# Altium PCB PCB1.PcbDoc
Units mil, origin at the board's own origin, x right, y up, seen from the top; angles counter-clockwise.
Board outline 12401 x 1377.95 mil, 2 copper layers (Top Layer, Bottom Layer); 90 components, 65 nets, 236 pads, 77 vias.
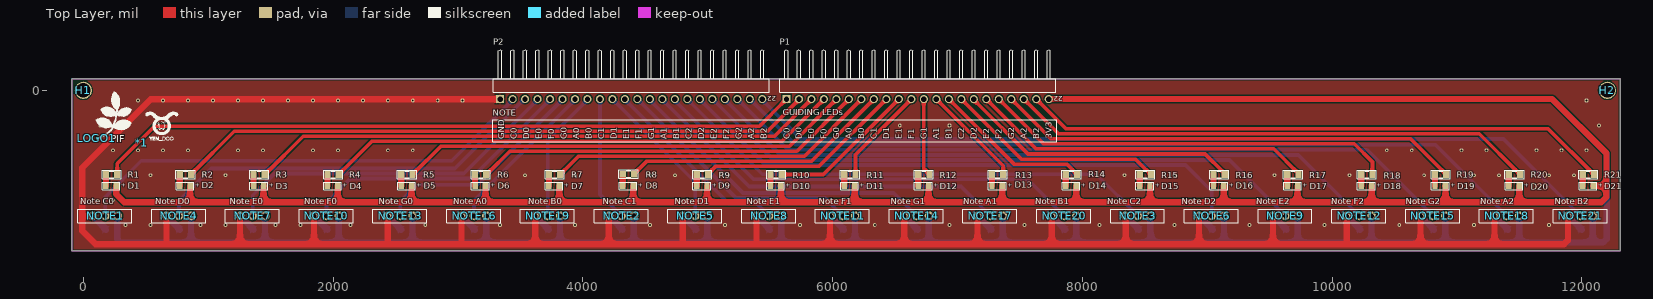
[diagram p0: Top Layer view]
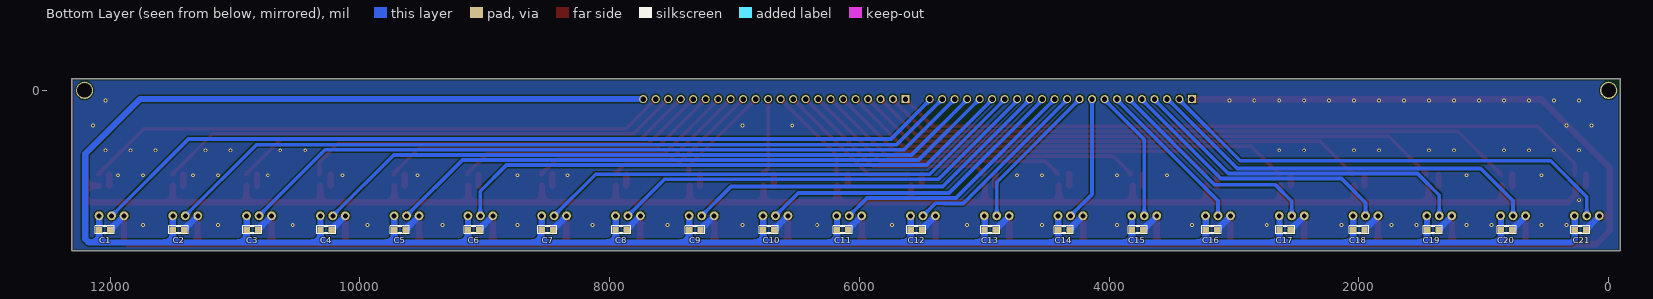
[diagram p1: Bottom Layer view, seen from below]
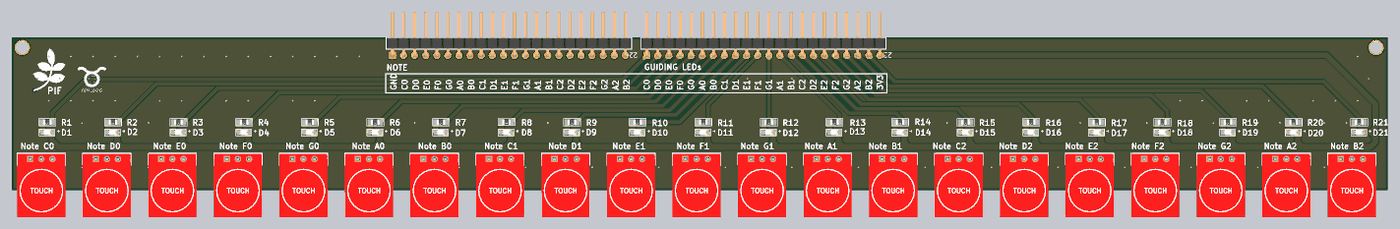
[diagram p2: 3D render of the assembled board from above, using the file's embedded part models]
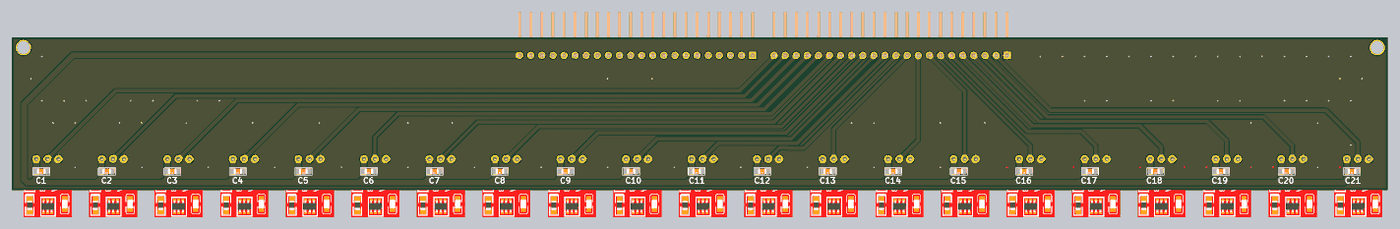
[diagram p3: 3D render of the assembled board from below, using the file's embedded part models]

## Layer stack, top to bottom
Top Solder: solder mask 0.4, Solder Resist, Dk 3.5
Top Layer: signal copper 1.4
Dielectric 1: dielectric 12.6, FR-4, Dk 4.8
Bottom Layer: signal copper 1.4
Bottom Solder: solder mask 0.4, Solder Resist, Dk 3.5

## Board outline
-93,-1286 -93,91.95 12308,91.95 12308,-1286

## Design rules (kind name [scope] priority, off if disabled: settings)
Clearance [All] p1: gap=10 ignorepadtopadclearanceinfootprint=FALSE except(0: Arc-Hole Track-Hole SMDPad-Hole THPad-Hole Via-Hole Fill-Hole Poly-Hole Region-Hole Text-Hole)
PolygonConnect [All] p1: connectstyle=Relief reliefconductorwidth=10 reliefentries=4 polygonreliefangle="90 Angle" airgapwidth=10
RoutingVias [All] p1: holewidth=28 width=50 viastyle="Through Hole" minholewidth=28 minwidth=50 maxholewidth=28 maxwidth=50
SolderMaskExpansion [All] p1: expansion=4 istentingtop=FALSE
Width [All] p1: maxlimit=50 minlimit=10 preferedwidth=30 minimp=50.000000 maximp=50.000000 favimp=50.000000
30 further rules are at their usual default settings.

## Components (designator, comment, footprint, x,y, rotation, side; value= is the part's Value field where it differs from the comment)
*1 "LOGO_DOO" Logo_Top_Overlay 468,-419 r0 top
C1 "Cap-100nF-50V-0805" CAP-SM-0805 11999,-1117 r0 bottom value=100nF/50V
C2 "Cap-100nF-50V-0805" CAP-SM-0805 11408.15,-1117 r0 bottom value=100nF/50V
C3 "Cap-100nF-50V-0805" CAP-SM-0805 10817.3,-1117 r0 bottom value=100nF/50V
C4 "Cap-100nF-50V-0805" CAP-SM-0805 10226.45,-1117 r0 bottom value=100nF/50V
C5 "Cap-100nF-50V-0805" CAP-SM-0805 9635.6,-1117 r0 bottom value=100nF/50V
C6 "Cap-100nF-50V-0805" CAP-SM-0805 9044.75,-1117 r0 bottom value=100nF/50V
C7 "Cap-100nF-50V-0805" CAP-SM-0805 8453.9,-1117 r0 bottom value=100nF/50V
C8 "Cap-100nF-50V-0805" CAP-SM-0805 7863.05,-1117 r0 bottom value=100nF/50V
C9 "Cap-100nF-50V-0805" CAP-SM-0805 7272.2,-1117 r0 bottom value=100nF/50V
C10 "Cap-100nF-50V-0805" CAP-SM-0805 6681.35,-1117 r0 bottom value=100nF/50V
C11 "Cap-100nF-50V-0805" CAP-SM-0805 6090.5,-1117 r0 bottom value=100nF/50V
C12 "Cap-100nF-50V-0805" CAP-SM-0805 5499.65,-1117 r0 bottom value=100nF/50V
C13 "Cap-100nF-50V-0805" CAP-SM-0805 4908.8,-1117 r0 bottom value=100nF/50V
C14 "Cap-100nF-50V-0805" CAP-SM-0805 4317.95,-1117 r0 bottom value=100nF/50V
C15 "Cap-100nF-50V-0805" CAP-SM-0805 3727.1,-1117 r0 bottom value=100nF/50V
C16 "Cap-100nF-50V-0805" CAP-SM-0805 3136.25,-1117 r0 bottom value=100nF/50V
C17 "Cap-100nF-50V-0805" CAP-SM-0805 2545.4,-1117 r0 bottom value=100nF/50V
C18 "Cap-100nF-50V-0805" CAP-SM-0805 1954.55,-1117 r0 bottom value=100nF/50V
C19 "Cap-100nF-50V-0805" CAP-SM-0805 1363.7,-1117 r0 bottom value=100nF/50V
C20 "Cap-100nF-50V-0805" CAP-SM-0805 772.85,-1117 r0 bottom value=100nF/50V
C21 "Cap-100nF-50V-0805" CAP-SM-0805 182,-1117 r0 bottom value=100nF/50V
D1 "Blue, 3.2V" WL-SMCW_0805 222,-765 r0 top
D2 "Blue, 3.2V" WL-SMCW_0805 813.33,-765 r0 top
D3 "Blue, 3.2V" WL-SMCW_0805 1404.67,-765 r0 top
D4 "Blue, 3.2V" WL-SMCW_0805 1996,-765 r0 top
D5 "Blue, 3.2V" WL-SMCW_0805 2587.33,-765 r0 top
D6 "Blue, 3.2V" WL-SMCW_0805 3178.66,-765 r0 top
D7 "Blue, 3.2V" WL-SMCW_0805 3770,-765 r0 top
D8 "Blue, 3.2V" WL-SMCW_0805 4361.33,-765 r0 top
D9 "Blue, 3.2V" WL-SMCW_0805 4952.66,-765 r0 top
D10 "Blue, 3.2V" WL-SMCW_0805 5544,-765 r0 top
D11 "Blue, 3.2V" WL-SMCW_0805 6135.33,-765 r0 top
D12 "Blue, 3.2V" WL-SMCW_0805 6726.66,-765 r0 top
D13 "Blue, 3.2V" WL-SMCW_0805 7318,-765 r0 top
D14 "Blue, 3.2V" WL-SMCW_0805 7909.33,-765 r0 top
D15 "Blue, 3.2V" WL-SMCW_0805 8500.66,-765 r0 top
D16 "Blue, 3.2V" WL-SMCW_0805 9092,-765 r0 top
D17 "Blue, 3.2V" WL-SMCW_0805 9683.33,-765 r0 top
D18 "Blue, 3.2V" WL-SMCW_0805 10274.66,-765 r0 top
D19 "Blue, 3.2V" WL-SMCW_0805 10865.99,-765 r0 top
D20 "Blue, 3.2V" WL-SMCW_0805 11457.33,-765 r0 top
D21 "Blue, 3.2V" WL-SMCW_0805 12048.66,-765 r0 top
H1 "Hole" "LO KHOAN 3MM" 0,0 r0 top
H2 "Hole" "LO KHOAN 3MM" 12204.72,0 r0 top
LOGO1 "LOGO PIF" "PIF LOGO BIG SSTOP" 98,-399 r0 top
NOTE1 "TTP223" TTP223 75,-1005 r0 top
NOTE2 "TTP223" TTP223 4209.9,-1005 r0 top
NOTE3 "TTP223" TTP223 8344.8,-1005 r0 top
NOTE4 "TTP223" TTP223 665.7,-1005 r0 top
NOTE5 "TTP223" TTP223 4800.6,-1005 r0 top
NOTE6 "TTP223" TTP223 8935.5,-1005 r0 top
NOTE7 "TTP223" TTP223 1256.4,-1005 r0 top
NOTE8 "TTP223" TTP223 5391.3,-1005 r0 top
NOTE9 "TTP223" TTP223 9526.2,-1005 r0 top
NOTE10 "TTP223" TTP223 1847.1,-1005 r0 top
NOTE11 "TTP223" TTP223 5982,-1005 r0 top
NOTE12 "TTP223" TTP223 10116.9,-1005 r0 top
NOTE13 "TTP223" TTP223 2437.8,-1005 r0 top
NOTE14 "TTP223" TTP223 6572.7,-1005 r0 top
NOTE15 "TTP223" TTP223 10707.6,-1005 r0 top
NOTE16 "TTP223" TTP223 3028.5,-1005 r0 top
NOTE17 "TTP223" TTP223 7163.4,-1005 r0 top
NOTE18 "TTP223" TTP223 11298.3,-1005 r0 top
NOTE19 "TTP223" TTP223 3619.2,-1005 r0 top
NOTE20 "TTP223" TTP223 7754.1,-1005 r0 top
NOTE21 "TTP223" TTP223 11889,-1005 r0 top
P1 "61302211021" 61302211021 6681,39.06 r180 top
P2 "61302211021" 61302211021 4387.23,39.06 r180 top
R1 "RESISTOR SMD" RES-SM-0805 271,-674 r180 top value=1k
R2 "RESISTOR SMD" RES-SM-0805 862.3,-674 r180 top value=1k
R3 "RESISTOR SMD" RES-SM-0805 1453.6,-674 r180 top value=1k
R4 "RESISTOR SMD" RES-SM-0805 2044.9,-674 r180 top value=1k
R5 "RESISTOR SMD" RES-SM-0805 2636.2,-674 r180 top value=1k
R6 "RESISTOR SMD" RES-SM-0805 3227.5,-674 r180 top value=1k
R7 "RESISTOR SMD" RES-SM-0805 3818.8,-674 r180 top value=1k
R8 "RESISTOR SMD" RES-SM-0805 4410,-670 r180 top value=1k
R9 "RESISTOR SMD" RES-SM-0805 5001.4,-674 r180 top value=1k
R10 "RESISTOR SMD" RES-SM-0805 5592.7,-674 r180 top value=1k
R11 "RESISTOR SMD" RES-SM-0805 6184,-674 r180 top value=1k
R12 "RESISTOR SMD" RES-SM-0805 6775.3,-674 r180 top value=1k
R13 "RESISTOR SMD" RES-SM-0805 7366.6,-674 r180 top value=1k
R14 "RESISTOR SMD" RES-SM-0805 7957.9,-674 r180 top value=1k
R15 "RESISTOR SMD" RES-SM-0805 8549.2,-674 r180 top value=1k
R16 "RESISTOR SMD" RES-SM-0805 9140.5,-674 r180 top value=1k
R17 "RESISTOR SMD" RES-SM-0805 9731.8,-674 r180 top value=1k
R18 "RESISTOR SMD" RES-SM-0805 10323.1,-674 r180 top value=1k
R19 "RESISTOR SMD" RES-SM-0805 10914.4,-674 r180 top value=1k
R20 "RESISTOR SMD" RES-SM-0805 11505.7,-674 r180 top value=1k
R21 "RESISTOR SMD" RES-SM-0805 12097,-674 r180 top value=1k

## Footprints (in the part's own frame and the unit in brackets; to place one, negate y for a bottom-side part, rotate by r counter-clockwise, add the part's x,y. Pads: shape width x height; smd on the part's side, far side on the other; paste and mask are expansions set on the pad)
61302211021 [mm] "Pin Header, pitch 2.54 mm, THT, Angled, single row, 22p"
  rect 1.65x1.65 hole 1.1: 1(26.67,2.77)
  round 1.65 hole 1.1: 2(24.13,2.77) 3(21.59,2.77) 4(19.05,2.77) 5(16.51,2.77) 6(13.97,2.77) 7(11.43,2.77) 8(8.89,2.77) 9(6.35,2.77) 10(3.81,2.77) 11(1.27,2.77) 12(-1.27,2.77) 13(-3.81,2.77) 14(-6.35,2.77) 15(-8.89,2.77) 16(-11.43,2.77) 17(-13.97,2.77) 18(-16.51,2.77) 19(-19.05,2.77) 20(-21.59,2.77) 21(-24.13,2.77) 22(-26.67,2.77)
  silkscreen extent -28.09,-7.27 28.09,1.35, body extent -27.94,-7.27 27.94,3.09, height 2.58
CAP-SM-0805 [mil]
  rect 50x55 smd: 1(0,0) 2(90,0)
  silkscreen extent -32,-34 121,33, body extent 6,-25 84,25, height 31
"LO KHOAN 3MM" [mil]
  round 138 hole 118.1: 1(0,0)
Logo_Top_Overlay [mil]
  silkscreen extent 30,16 290,246
"PIF LOGO BIG SSTOP" [mil]
  rect 15x15 smd: 1(11,14)
  silkscreen extent 0,14 289,389
RES-SM-0805 [mil]
  rect 50x55 smd: 1(0,0) 2(90,0)
  silkscreen extent -32,-34 121,33, body extent 6,-25 84,25, height 31
TTP223 [mm]
  round 1.8 hole 1: 1(0,0) 2(2.54,0) 3(5.08,0)
  silkscreen extent -3.02,-1.4 7.95,1.32, body extent -3.04,-13.32 7.96,1.19, height 13.41
WL-SMCW_0805 [mm] "SMD Mono-color Chip LED, body 2.0x1.25mm"
  rect 1.1x1.2 smd: 1(-1.05,0) 2(1.05,0)
  silkscreen extent -1.8,-0.79 1.8,0.79, body extent -1,-0.63 1,0.62, height 0.7

## Part data
C1 C2 C3 C4 C5 C6 C7 C8 C9 C10 C11 C12 C13 C14 C15 C16 C17 C18 C19 C20 C21: "CAP CER 0.1UF 50V Y5V 0805", Manufacturer="Samsung Electro-Mechanics", Manufacturer Part Number=CL21F104ZBCNNNC, Supplier 1 Part Number=1276-1007-1-ND, Local Supplier=thegioiic, Local Supplier Link=https://thegioiic.com/products/tu-100nf-0-1uf-50v-0805, Supplier 1=Digikey, Supplier 1 Link=https://www.digikey.com/product-detail/en/samsung-electro-mechanics/CL21F104ZBCNNNC/1276-1007-1-ND/3889093
D1 D2 D3 D4 D5 D6 D7 D8 D9 D10 D11 D12 D13 D14 D15 D16 D17 D18 D19 D20 D21: library part 150080BS75000, "WL-SMCW SMT Mono-color Chip LED Waterclear, size 0805, Blue, 3.2V, 140deg", Emitting Color=Blue, Forward Voltage typ.=3.2V, Operating Temperature="-40 to +85degC", Chip Technology=InGaN, ComponentLink1Description=Manufacturer, ComponentLink1URL=http://www.we-online.de, ComponentLink2Description=Datasheet, ComponentLink2URL=https://www.we-online.com/catalog/datasheet/150080BS75000.pdf, Dominant Wavelength typ.=470nm, Luminous Intensity typ.=145mcd, Mounting Technology=SMT, Packaging="Tape and Reel", Part Number=150080BS75000, Peak Wavelength typ.=465nm, Published Date="December 2019", Publisher="Wurth Elektronik", Size=0805, Viewing Angle=140deg
H1 H2: "Hole 3mm"
P1 P2: "WR-PHD Pin Header, THT, pitch 2.54mm, Single Row, Angled, 22p", Contact Resistance=20mOhm, Manufacturer="Wurth Elektronik", Operating Temperature="-40 to +105degC", Rated Current=3A, Withstanding Voltage=500VAC, Working Voltage=250VAC, ComponentLink1Description=Manufacturer, ComponentLink1URL=http://www.we-online.de, ComponentLink2Description=Datasheet, ComponentLink2URL=https://www.we-online.com/catalog/datasheet/61302211021.pdf, Gender="Pin Header", Manufacturer Part Number=61302211021, Mounting Technology=THT, Orientation=Angled, Packaging=Bag, Pin Number=22, Pitch=2.54mm, Published Date="May 2020", Row Number=Single
R1 R2 R3 R4 R5 R6 R7 R8 R9 R10 R11 R12 R13 R14 R15 R16 R17 R18 R19 R20 R21: "Resistor"

## Via types
v1: diameter 31.5/31.5 (per signal layer), hole 15.75, Top Layer to Bottom Layer, tented both sides, 77 vias

## Nets (pads, with @x,y where several pads share a name; then routed paths per layer and width w, separated by ;. In a path a pad name is that pad's centre, name@x,y a point inside that pad or via, vN(x,y) a via of type N, cw(c..) or ccw(c..) an arc to the next point about the centre after c; other vN are vias at no path point)
3V3: C1.2 C2.2 C3.2 C4.2 C5.2 C6.2 C7.2 C8.2 C9.2 C10.2 C11.2 C12.2 C13.2 C14.2 C15.2 C16.2 C17.2 C18.2 C19.2 C20.2 C21.2 D1.2 D2.2 D3.2 D4.2 D5.2 D6.2 D7.2 D8.2 D9.2 D10.2 D11.2 D12.2 D13.2 D14.2 D15.2 D16.2 D17.2 D18.2 D19.2 D20.2 D21.2 NOTE1.3 NOTE2.3 NOTE3.3 NOTE4.3 NOTE5.3 NOTE6.3 NOTE7.3 NOTE8.3 NOTE9.3 NOTE10.3 NOTE11.3 NOTE12.3 NOTE13.3 NOTE14.3 NOTE15.3 NOTE16.3 NOTE17.3 NOTE18.3 NOTE19.3 NOTE20.3 NOTE21.3 P1.22 | length 41408.1
  Top Layer w50: D1.2 263,-765.34 263,-831 328,-896 854,-896 ; D2.2 854,-765.67 854,-896 ; D3.2 1443,-768 1443,-896 ; D4.2 2037,-765.34 2037,-896 ; D5.2 2628,-765.67 2628,-896 ; D6.2 3220,-896 ; D7.2 3812,-765.66 3812,-896 ; D8.2 4403,-765.33 4403,-896 ; D9.2 4994,-896 ; D10.2 5586,-765.66 5586,-896 ; D11.2 6177,-765.33 6177,-896 ; D12.2 6768,-896 ; D13.2 7359,-765.33 7359,-896 ; P1.22@7731,-69 11761,-69 12198,-506 12198,-765 ; D14.2 7951,-765.33 7951,-896 ; D15.2 8542,-896 ; D16.2 9133,-765.33 9133,-896 ; D17.2@9724,-765.67 9724,-896 ; D18.2 10317,-766 10317,-896 ; D19.2 10908,-765.67 10908,-896 ; D20.2 11499,-765.33 11499,-896 ; D21.2 12198,-765 ; 854,-896 1443,-896 ; 1443,-896 2037,-896 ; 2037,-896 2628,-896 ; 2628,-896 3220,-896 ; 3220,-896 3812,-896 ; 3812,-896 4403,-896 ; 4403,-896 4994,-896 ; 4994,-896 5586,-896 ; 5586,-896 6177,-896 ; 6177,-896 6768,-896 ; 6768,-896 7359,-896 ; 7359,-896 7951,-896 ; 7951,-896 8542,-896 ; 8542,-896 9133,-896 ; 9133,-896 9724,-896 ; 9724,-896 10317,-896 ; 10317,-896 10908,-896 ; 10908,-896 11499,-896 ; 11499,-896 12155,-896 12198,-853 12198,-765
  Bottom Layer w50: NOTE1.3 272,-1008 C21.2 272,-1189.71 301.29,-1219 863,-1219 ; NOTE4.3 862.85,-1007.85 C20.2 862.85,-1134.14 863,-1134.29 863,-1219 ; NOTE7.3 1454,-1007.4 1454,-1117 1454,-1219 ; NOTE10.3 2045,-1007.1 2045,-1117 2045,-1219 ; NOTE13.3 2635.4,-1007.4 2635.4,-1134.14 2635,-1134.54 2635,-1219 ; NOTE16.3 3226,-1007.5 3226,-1117 3226,-1219 ; NOTE19.3 3817,-1007.2 3817,-1117 3817,-1219 ; NOTE2.3 4408,-1006.9 C14.2 4408,-1219 ; NOTE5.3 4997,-1008.6 4997,-1117 4997,-1219 ; NOTE8.3 5589,-1007.3 5589,-1117 5589,-1219 ; NOTE11.3 6180,-1007 6180,-1117 6180,-1219 ; NOTE14.3 6770,-1007.7 6770,-1117 6770,-1219 ; NOTE17.3 7362,-1006.4 7362,-1099.66 7362.2,-1099.86 C9.2 7362.2,-1134.14 7364,-1135.94 7364,-1219 ; P1.22@7731,-69 11760,-69 12199,-508 12199,-1189.71 12169.71,-1219 12088,-1219 ; NOTE20.3 7951,-1008.1 7951,-1117 7951,-1219 ; C7.2 8543.9,-1134.14 8548.8,-1139.04 8548.8,-1219 ; C7.2@8544.8,-1117 NOTE3.3 ; NOTE6.3 9135,-1005.5 9135,-1117 9135,-1219 ; NOTE9.3 9725,-1006.2 9725,-1117 9725,-1219 ; NOTE12.3 10316,-1005.9 10316,-1117 10316,-1219 ; NOTE15.3 10907,-1005.6 10907,-1117 10907,-1219 ; NOTE18.3 11499,-1005.7 11499,-1117 11499,-1219 ; NOTE21.3 12088,-1006 12088,-1117 12088,-1219 ; 863,-1219 1454,-1219 ; 1454,-1219 2045,-1219 ; 2045,-1219 2635,-1219 ; 2635,-1219 3226,-1219 ; 3226,-1219 3817,-1219 ; 3817,-1219 4408,-1219 ; 4408,-1219 4997,-1219 ; 4997,-1219 5589,-1219 ; 5589,-1219 6180,-1219 ; 6180,-1219 6770,-1219 ; 6770,-1219 7364,-1219 ; 7364,-1219 7951,-1219 ; 7951,-1219 8548.8,-1219 ; 8548.8,-1219 9135,-1219 ; 9135,-1219 9725,-1219 ; 9725,-1219 10316,-1219 ; 10316,-1219 10907,-1219 ; 10907,-1219 11499,-1219 ; 11499,-1219 12088,-1219
GND: C1.1 C2.1 C3.1 C4.1 C5.1 C6.1 C7.1 C8.1 C9.1 C10.1 C11.1 C12.1 C13.1 C14.1 C15.1 C16.1 C17.1 C18.1 C19.1 C20.1 C21.1 NOTE1.1 NOTE2.1 NOTE3.1 NOTE4.1 NOTE5.1 NOTE6.1 NOTE7.1 NOTE8.1 NOTE9.1 NOTE10.1 NOTE11.1 NOTE12.1 NOTE13.1 NOTE14.1 NOTE15.1 NOTE16.1 NOTE17.1 NOTE18.1 NOTE19.1 NOTE20.1 NOTE21.1 P2.1 | length 23943.5
  Top Layer w50: NOTE1.1 71.01,-1008.99 -7.99,-1008.99 ; NOTE4.1 665.7,-1226.7 671,-1232 ; NOTE7.1 1254,-1007.4 1254,-1232 ; NOTE10.1 1848,-1005.9 1848,-1232 ; NOTE13.1 2437.8,-1226.2 2432,-1232 ; NOTE16.1 3028.5,-1226.5 3034,-1232 ; P2.1@3337.23,-71 540,-71 -8,-619 -8,-1009 ; NOTE19.1 3619,-1005.2 3619,-1232 ; NOTE2.1 4208,-1006.9 4208,-1232 ; NOTE5.1 4800.6,-1227.6 4805,-1232 ; NOTE8.1 5391.3,-1227.7 5387,-1232 ; NOTE11.1 5979,-1008 5979,-1232 ; NOTE14.1 6574,-1006.3 6574,-1232 ; NOTE17.1 7160,-1008.4 7160,-1232 ; NOTE20.1 7755,-1005.9 7755,-1232 ; NOTE3.1 8348,-1008.2 8348,-1232 ; NOTE6.1 8935,-1005.5 8935,-1232 ; NOTE9.1 9526,-1005.2 9526,-1232 ; NOTE12.1 10116.9,-1226.1 10111,-1232 ; NOTE15.1 10709,-1006.4 10709,-1232 ; NOTE18.1 11300,-1006.7 11300,-1232 ; NOTE21.1 11889,-1200 11857,-1232 11300,-1232 ; -8,-1009 -8,-1125 99,-1232 671,-1232 ; 671,-1232 1254,-1232 ; 1254,-1232 1848,-1232 ; 1848,-1232 2432,-1232 ; 2432,-1232 3034,-1232 ; 3034,-1232 3619,-1232 ; 3619,-1232 4208,-1232 ; 4208,-1232 4805,-1232 ; 4805,-1232 5387,-1232 ; 5387,-1232 5979,-1232 ; 5979,-1232 6574,-1232 ; 6574,-1232 7160,-1232 ; 7160,-1232 7755,-1232 ; 7755,-1232 8348,-1232 ; 8348,-1232 8935,-1232 ; 8935,-1232 9526,-1232 ; 9526,-1232 10111,-1232 ; 10111,-1232 10709,-1232 ; 10709,-1232 11300,-1232
  Bottom Layer w50: NOTE1.1 75,-1007.5 182,-1114.5 C21.1 ; NOTE4.1 665.7,-1007.35 772.85,-1114.5 C20.1 ; NOTE7.1 1256.4,-1007.2 1363.7,-1114.5 C19.1 ; NOTE10.1 1847.1,-1007.05 1954.55,-1114.5 C18.1 ; NOTE13.1 2437.8,-1006.9 2545.4,-1114.5 C17.1 ; NOTE16.1 3028.5,-1006.75 3136.25,-1114.5 C16.1 ; NOTE19.1 3619.2,-1006.6 3727.1,-1114.5 C15.1 ; NOTE2.1 4209.9,-1006.45 4317.95,-1114.5 C14.1 ; NOTE5.1 4800.6,-1006.3 4908.8,-1114.5 C13.1 ; NOTE8.1 5391.3,-1006.15 5499.65,-1114.5 C12.1 ; NOTE11.1 5982,-1006 6090.5,-1114.5 C11.1 ; NOTE14.1 6572.7,-1005.85 6681.35,-1114.5 C10.1 ; NOTE17.1 7163.4,-1005.7 7272.2,-1114.5 C9.1 ; NOTE20.1 7754.1,-1005.55 7863.05,-1114.5 C8.1 ; NOTE3.1 8344.8,-1005.4 8453.9,-1114.5 C7.1 ; NOTE6.1 8935.5,-1005.25 9044.75,-1114.5 C6.1 ; NOTE9.1 9526.2,-1005.1 9635.6,-1114.5 C5.1 ; NOTE12.1 10116.95,-1005 10226.45,-1114.5 C4.1 ; NOTE15.1 10707.8,-1005 10817.3,-1114.5 C3.1 ; NOTE18.1 11298.65,-1005 11408.15,-1114.5 C2.1 ; NOTE21.1 11998.5,-1114.5 11999,-1114.5 C1.1
  other v1: 338,-1080 538,-1080 938,-1080 1138,-1080 1538,-1080 1738,-1080 2138,-1080 2738,-1080 3338,-1080 3938,-1080 4538,-1080 5138,-1080 5738,-1080 6338,-1080 6938,-1080 7538,-1080 8138,-1080 8738,-1080 9338,-1080 9938,-1080 10538,-1080 11138,-1080 11738,-1080 238,-880 538,-680 1138,-680 3538,-680 3938,-680 4538,-680 4738,-680 8338,-680 8738,-680 9538,-680 10138,-680 10738,-680 11138,-680 11338,-680 11738,-680 11938,-680 238,-480 438,-480 638,-480 838,-480 1238,-480 1438,-480 1838,-480 2038,-480 2438,-480 2638,-480 10438,-480 10638,-480 11038,-480 11238,-480 11638,-480 11838,-480 12038,-480 138,-280 338,-280 6538,-280 6938,-280 12138,-280 238,-80 438,-80 638,-80 838,-80 1038,-80 1238,-80 1438,-80 1638,-80 1838,-80 2038,-80 2238,-80 2438,-80 2638,-80 2838,-80 3038,-80 12038,-80
LED_A0: P1.6 R6.1 | length 3156.1
  Top Layer w30: R6.1 3227.5,-671.5 3237.5,-661.5 3240,-661.5 3414.5,-487 5714,-487 P1.6 P1.6@6131,-69
LED_A1: P1.13 R13.1 | length 826.9
  Top Layer w30: P1.13@6831,-69 7366.6,-604.6 R13.1
LED_A2: P1.20 R20.1 | length 4226.8
  Top Layer w30: P1.20@7531,-69 7809,-347 11178.7,-347 11493.2,-661.5 11495.7,-661.5 11505.7,-671.5 R20.1
LED_B0: P1.7 R7.1 | length 2664.8
  Top Layer w30: R7.1 3818.8,-671.5 3828.8,-661.5 3831.3,-661.5 3965.8,-527 5774,-527 P1.7 P1.7@6231,-69
LED_B1: P1.14 R14.1 | length 1279
  Top Layer w30: P1.14@6931,-69 7453,-591 7874.9,-591 7945.4,-661.5 7947.9,-661.5 7957.9,-671.5 R14.1
LED_B2: P1.21 R21.1 | length 4718.1
  Top Layer w30: P1.21@7631,-69 7869,-307 11730,-307 12084.5,-661.5 12087,-661.5 12097,-671.5 R21.1
LED_C0: P1.1 R1.1 | length 5661.1
  Top Layer w30: R1.1 271,-587 571,-287 5413.95,-287 5613.47,-87.48 5613.52,-87.48 P1.1
LED_C1: P1.8 R8.1 | length 2172
  Top Layer w30: R8.1 4410,-667.5 4420,-657.5 4422.5,-657.5 4513,-567 5834,-567 P1.8 P1.8@6331,-69
LED_C2: P1.15 R15.1 | length 1770.3
  Top Layer w30: P1.15@7031,-69 7513,-551 8426.2,-551 8536.7,-661.5 8539.2,-661.5 8549.2,-671.5 R15.1
LED_D0: P1.2 R2.1 | length 5122.7
  Top Layer w30: R2.1 862.3,-671.5 872.3,-661.5 874.8,-661.5 1209.3,-327 5478,-327 5731,-74 P1.2
LED_D1: P1.9 R9.1 | length 1681.7
  Top Layer w30: R9.1 5001.4,-671.5 5065.9,-607 5893,-607 P1.9@6431,-69
LED_D2: P1.16 R16.1 | length 2268.6
  Top Layer w30: P1.16@7131,-69 7131,-76 7564,-509 8983,-509 9130.5,-656.5 9130.5,-664 R16.1
LED_E0: P1.3 R3.1 | length 4630
  Top Layer w30: R3.1 1453.6,-671.5 1463.6,-661.5 1466.1,-661.5 1760.6,-367 5534,-367 P1.3 P1.3@5831,-69
LED_E1: P1.10 R10.1 | length 1188.9
  Top Layer w30: R10.1 5926,-674 P1.10@6531,-69
LED_E2: P1.17 R17.1 | length 2755.6
  Top Layer w30: P1.17@7231,-69 7630,-468 9533,-468 9721.8,-656.8 9721.8,-664 R17.1
LED_F0: P1.4 R4.1 | length 4138.7
  Top Layer w30: R4.1 2044.9,-671.5 2054.9,-661.5 2057.4,-661.5 2311.9,-407 5594,-407 P1.4 P1.4@5931,-69
LED_F1: P1.11 R11.1 | length 790.2
  Top Layer w30: R11.1 6184,-516 P1.11@6631,-69
LED_F2: P1.18 R18.1 | length 3301.2
  Top Layer w30: P1.18@7331,-69 7690,-428 10177,-428 10323.1,-574.1 R18.1
LED_G0: P1.5 R5.1 | length 3647.4
  Top Layer w30: R5.1 2636.2,-671.5 2646.2,-661.5 2648.7,-661.5 2863.2,-447 5654,-447 P1.5 P1.5@6031,-69
LED_G1: P1.12 R12.1 | length 623.3
  Top Layer w30: P1.12@6731,-69 6731,-627.2 6775.3,-671.5 R12.1
LED_G2: P1.19 R19.1 | length 3735.5
  Top Layer w30: P1.19@7431,-69 7749,-387 10627.4,-387 10901.9,-661.5 10904.4,-661.5 10914.4,-671.5 R19.1
NetD1_1: D1.1 R1.2 | length 91.1
  Top Layer w50: D1.1 181,-764.66 R1.2
NetD2_1: D2.1 R2.2 | length 91.1
  Top Layer w50: D2.1 772.3,-764.69 R2.2
NetD3_1: D3.1 R3.2 | length 91.1
  Top Layer w50: D3.1 1363.6,-764.73 R3.2
NetD4_1: D4.1 R4.2 | length 91.1
  Top Layer w50: D4.1 1954.9,-764.76 R4.2
NetD5_1: D5.1 R5.2 | length 91.1
  Top Layer w50: D5.1 2546.2,-764.79 R5.2
NetD6_1: D6.1 R6.2 | length 91.1
  Top Layer w50: D6.1 3137.5,-764.83 R6.2
NetD7_1: D7.1 R7.2 | length 91.1
  Top Layer w50: D7.1 3728.8,-764.86 R7.2
NetD8_1: D8.1 R8.2 | length 95
  Top Layer w50: D8.1 R8.2
NetD9_1: D9.1 R9.2 | length 91
  Top Layer w50: D9.1 4911.4,-764.93 R9.2
NetD10_1: D10.1 R10.2 | length 91
  Top Layer w50: D10.1 D10.1 R10.2
NetD11_1: D11.1 R11.2 | length 91
  Top Layer w50: D11.1 R11.2
NetD12_1: D12.1 R12.2 | length 91
  Top Layer w50: D12.1 R12.2
NetD13_1: D13.1 R13.2 | length 91
  Top Layer w50: R13.2 7276.6,-764.94 D13.1
NetD14_1: D14.1 R14.2 | length 91
  Top Layer w50: R14.2 7867.9,-764.91 D14.1
NetD15_1: D15.1 R15.2 | length 91.1
  Top Layer w50: R15.2 8459.2,-764.88 D15.1
NetD16_1: D16.1 R16.2 | length 91.1
  Top Layer w50: R16.2 9050.5,-764.84 D16.1
NetD17_1: D17.1 R17.2 | length 91.1
  Top Layer w50: R17.2 9641.8,-764.81 D17.1
NetD18_1: D18.1 R18.2 | length 91.1
  Top Layer w50: R18.2 10233.1,-764.78 D18.1
NetD19_1: D19.1 R19.2 | length 91.1
  Top Layer w50: R19.2 10824.4,-764.74 D19.1
NetD20_1: D20.1 R20.2 | length 91.1
  Top Layer w50: R20.2 11415.7,-764.71 D20.1
NetD21_1: D21.1 R21.2 | length 91.1
  Top Layer w50: R21.2 12007,-764.68 D21.1
TS_A0: NOTE16.2 P2.7 | length 1270
  Bottom Layer w30: NOTE16.2 3128.5,-884.5 3937.23,-75.77 P2.7
TS_A1: NOTE17.2 P2.14 | length 3013.3
  Bottom Layer w30: P2.14@4635.83,-73.83 5332,-770 7028.4,-770 NOTE17.2
TS_A2: NOTE18.2 P2.21 | length 6432.7
  Bottom Layer w30: P2.21@5348.26,-81.26 5703,-436 10829.3,-436 NOTE18.2
TS_B0: NOTE19.2 P2.8 | length 1066.7
  Bottom Layer w30: NOTE19.2 3719.2,-392.8 4037.23,-74.77 P2.8
TS_B1: NOTE20.2 P2.15 | length 3492.9
  Bottom Layer w30: P2.15@4741.34,-87.34 5366,-712 7561,-712 7854,-1005 NOTE20.2
TS_B2: NOTE21.2 P2.22 | length 6932.6
  Bottom Layer w30: P2.22@5441.96,-83.96 5747,-389 11373,-389 NOTE21.2@11991.84,-1007.84
TS_C0: NOTE1.2 P2.2 | length 3742.3
  Bottom Layer w30: NOTE1.2 175,-853.42 464,-564.42 2949.58,-564.42 3437.23,-76.77 P2.2
TS_C1: NOTE2.2 P2.9 | length 1006.5
  Bottom Layer w30: P2.9 4138,-70.77 4138,-833.1 NOTE2.2
TS_C2: NOTE3.2 P2.16 | length 3989
  Bottom Layer w30: P2.16@4840.7,-75.7 5437,-672 8111.8,-672 NOTE3.2
TS_D0: NOTE4.2 P2.3 | length 3209.7
  Bottom Layer w30: NOTE4.2 765.7,-884.13 1023.83,-626 2975,-626 P2.3@3521.33,-79.67
TS_D1: NOTE5.2 P2.10 | length 1208.4
  Bottom Layer w30: P2.10@4236.61,-71.61 4900.6,-735.6 NOTE5.2
TS_D2: NOTE6.2 P2.17 | length 4593.5
  Bottom Layer w30: P2.17@4942.61,-78.61 5462,-598 8827,-598 9036.99,-807.99 NOTE6.2@9036.99,-1005
TS_E0: NOTE7.2 P2.4 | length 2768.4
  Bottom Layer w30: NOTE7.2 1356.4,-839.6 1530,-666 3047,-666 3637.23,-75.77 P2.4
TS_E1: NOTE8.2 P2.11 | length 1515.2
  Bottom Layer w30: P2.11@4355.56,-93.56 5168,-906 5318.65,-906 5320.97,-903.68 5389.98,-903.68 NOTE8.2
TS_E2: NOTE9.2 P2.18 | length 4978.5
  Bottom Layer w30: P2.18@5036.17,-67.17 5527,-558 9179.2,-558 NOTE9.2
TS_F0: NOTE10.2 P2.5 | length 2242.6
  Bottom Layer w30: NOTE10.2@1946.6,-1005 1946.6,-899.4 2140,-706 3106,-706 3737.23,-74.77 P2.5
TS_F1: NOTE11.2 P2.12 | length 2009
  Bottom Layer w30: P2.12@4452.88,-87.88 5227,-862 5939,-862 NOTE11.2
TS_F2: NOTE12.2 P2.19 | length 5460
  Bottom Layer w30: P2.19@5141.18,-77.18 5582,-518 9729.9,-518 NOTE12.2
TS_G0: NOTE13.2 P2.6 | length 1757.3
  Bottom Layer w30: NOTE13.2 2537.8,-888.2 2669,-757 3154,-757 3837.23,-73.77 P2.6
TS_G1: NOTE14.2 P2.13 | length 2532.6
  Bottom Layer w30: P2.13@4528.15,-68.15 5282,-822 6489.7,-822 NOTE14.2
TS_G2: NOTE15.2 P2.20 | length 5961.8
  Bottom Layer w30: P2.20@5233.93,-67.93 5642,-476 10278.6,-476 NOTE15.2
pads on no net: H1.1 H2.1 LOGO1.1

## Polygon pours and split planes (outlines as drawn)
GND on Top Layer "GND_L01_P000" (solid, remove dead copper, pour order 0): -93,-1286 -93,91.95 12308,91.95 12308,-1286
GND on Bottom Layer "GND_L02_P001" (solid, remove dead copper, pour order 1): -93,-1286 -93,91.95 12308,91.95 12308,-1286

## Keep-outs
Keep-Out Layer:
  the board outline again, w10

## Silkscreen, mask and mechanical layers (free items; w line width, h text height)
Top Overlay:
  lines w10: 3277,-410 7794,-410 7794,-236.16 3277,-236.16 3277,-410
  text "GUIDING LEDs" at 5601,-199 h50
  text "NOTE" at 3278,-204 h50
  text "3V3" at 7756,-387 h50 r90
  text "GND" at 3372,-390 h50 r90
  text "C0" at 3472.05,-390 h50 r90
  text "D0" at 3572.09,-390 h50 r90
  text "E0" at 3672.14,-390 h50 r90
  text "F0" at 3772.19,-390 h50 r90
  text "G0" at 3872.24,-390 h50 r90
  text "A0" at 3972.28,-390 h50 r90
  text "B0" at 4072.33,-390 h50 r90
  text "C1" at 4172.38,-390 h50 r90
  text "D1" at 4272.43,-390 h50 r90
  text "E1" at 4372.48,-390 h50 r90
  text "F1" at 4472.52,-390 h50 r90
  text "G1" at 4572.57,-390 h50 r90
  text "A1" at 4672.62,-390 h50 r90
  text "B1" at 4772.66,-390 h50 r90
  text "C2" at 4872.71,-390 h50 r90
  text "D2" at 4972.76,-390 h50 r90
  text "E2" at 5072.81,-390 h50 r90
  text "F2" at 5172.85,-390 h50 r90
  text "G2" at 5272.9,-390 h50 r90
  text "A2" at 5372.95,-390 h50 r90
  text "B2" at 5473,-390 h50 r90
  text "C0" at 5655.05,-390 h50 r90
  text "D0" at 5755.1,-390 h50 r90
  text "E0" at 5855.14,-390 h50 r90
  text "F0" at 5955.19,-390 h50 r90
  text "G0" at 6055.24,-390 h50 r90
  text "A0" at 6155.28,-390 h50 r90
  text "B0" at 6255.33,-390 h50 r90
  text "C1" at 6355.38,-390 h50 r90
  text "D1" at 6455.43,-390 h50 r90
  text "E1" at 6555.48,-390 h50 r90
  text "F1" at 6655.52,-390 h50 r90
  text "G1" at 6755.57,-390 h50 r90
  text "A1" at 6855.62,-390 h50 r90
  text "B1" at 6955.66,-390 h50 r90
  text "C2" at 7055.71,-390 h50 r90
  text "D2" at 7155.76,-390 h50 r90
  text "E2" at 7255.81,-390 h50 r90
  text "F2" at 7355.85,-390 h50 r90
  text "G2" at 7455.9,-390 h50 r90
  text "A2" at 7555.95,-390 h50 r90
  text "B2" at 7656,-390 h50 r90
  text "Note C0" at -23,-913 h50
  text "Note D0" at 574.35,-913 h50
  text "Note E0" at 1171.7,-913 h50
  text "Note F0" at 1769.04,-913 h50
  text "Note G0" at 2366.39,-913 h50
  text "Note A0" at 2963.74,-913 h50
  text "Note B0" at 3561.09,-913 h50
  text "Note C1" at 4158.43,-913 h50
  text "Note D1" at 4735.79,-913 h50
  text "Note E1" at 5313.14,-913 h50
  text "Note F1" at 5890.5,-913 h50
  text "Note G1" at 6467.85,-913 h50
  text "Note A1" at 7045.2,-913 h50
  text "Note B1" at 7622.56,-913 h50
  text "Note C2" at 8199.91,-913 h50
  text "Note D2" at 8797.26,-913 h50
  text "Note E2" at 9394.61,-913 h50
  text "Note F2" at 9991.96,-913 h50
  text "Note G2" at 10589.3,-913 h50
  text "Note A2" at 11186.65,-913 h50
  text "Note B2" at 11784,-913 h50

## Text inside footprints (layer, text, board x,y; h text height)
D1: Top Overlay "+" at 337,-776 h30 r90
D2: Top Overlay "+" at 928.33,-776 h30 r90
D3: Top Overlay "+" at 1519.67,-776 h30 r90
D4: Top Overlay "+" at 2111,-776 h30 r90
D5: Top Overlay "+" at 2702.33,-776 h30 r90
D6: Top Overlay "+" at 3293.66,-776 h30 r90
D7: Top Overlay "+" at 3885,-776 h30 r90
D8: Top Overlay "+" at 4476.33,-776 h30 r90
D9: Top Overlay "+" at 5067.66,-776 h30 r90
D10: Top Overlay "+" at 5659,-776 h30 r90
D11: Top Overlay "+" at 6250.33,-776 h30 r90
D12: Top Overlay "+" at 6841.66,-776 h30 r90
D13: Top Overlay "+" at 7433,-776 h30 r90
D14: Top Overlay "+" at 8024.33,-776 h30 r90
D15: Top Overlay "+" at 8615.66,-776 h30 r90
D16: Top Overlay "+" at 9207,-776 h30 r90
D17: Top Overlay "+" at 9798.33,-776 h30 r90
D18: Top Overlay "+" at 10389.66,-776 h30 r90
D19: Top Overlay "+" at 10980.99,-776 h30 r90
D20: Top Overlay "+" at 11572.33,-776 h30 r90
D21: Top Overlay "+" at 12163.66,-776 h30 r90
LOGO1: Top Overlay "PIF" at 219.67,-416 h56.25
P1: Top Overlay "22" at 7843.99,-47.56 h40 r180
P2: Top Overlay "22" at 5550.23,-47.56 h40 r180